# Altium PCB PCB1 - 修改mos管.PcbDoc
Units mil, origin at the board's own origin, x right, y up, seen from the top; angles counter-clockwise.
Board outline 3942.02 x 3942.03 mil, 2 copper layers (Top Layer, Bottom Layer); 55 components, 42 nets, 188 pads, 32 vias.
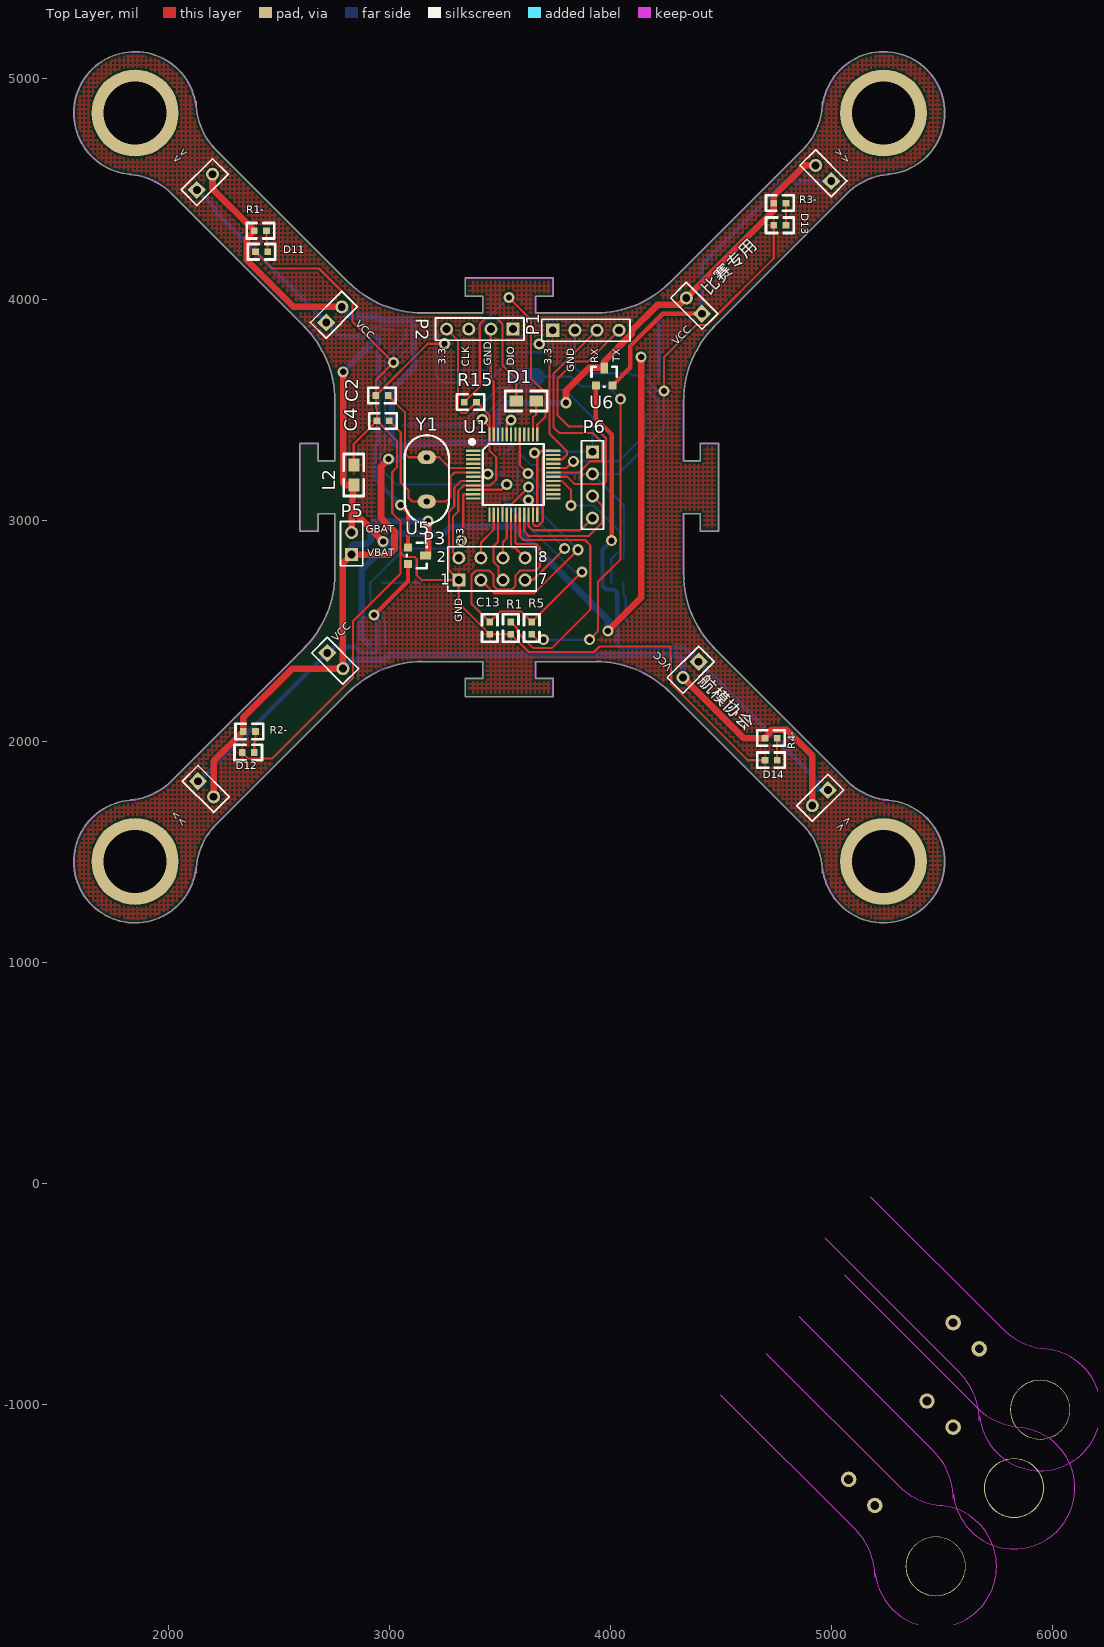
[diagram p0: Top Layer view]
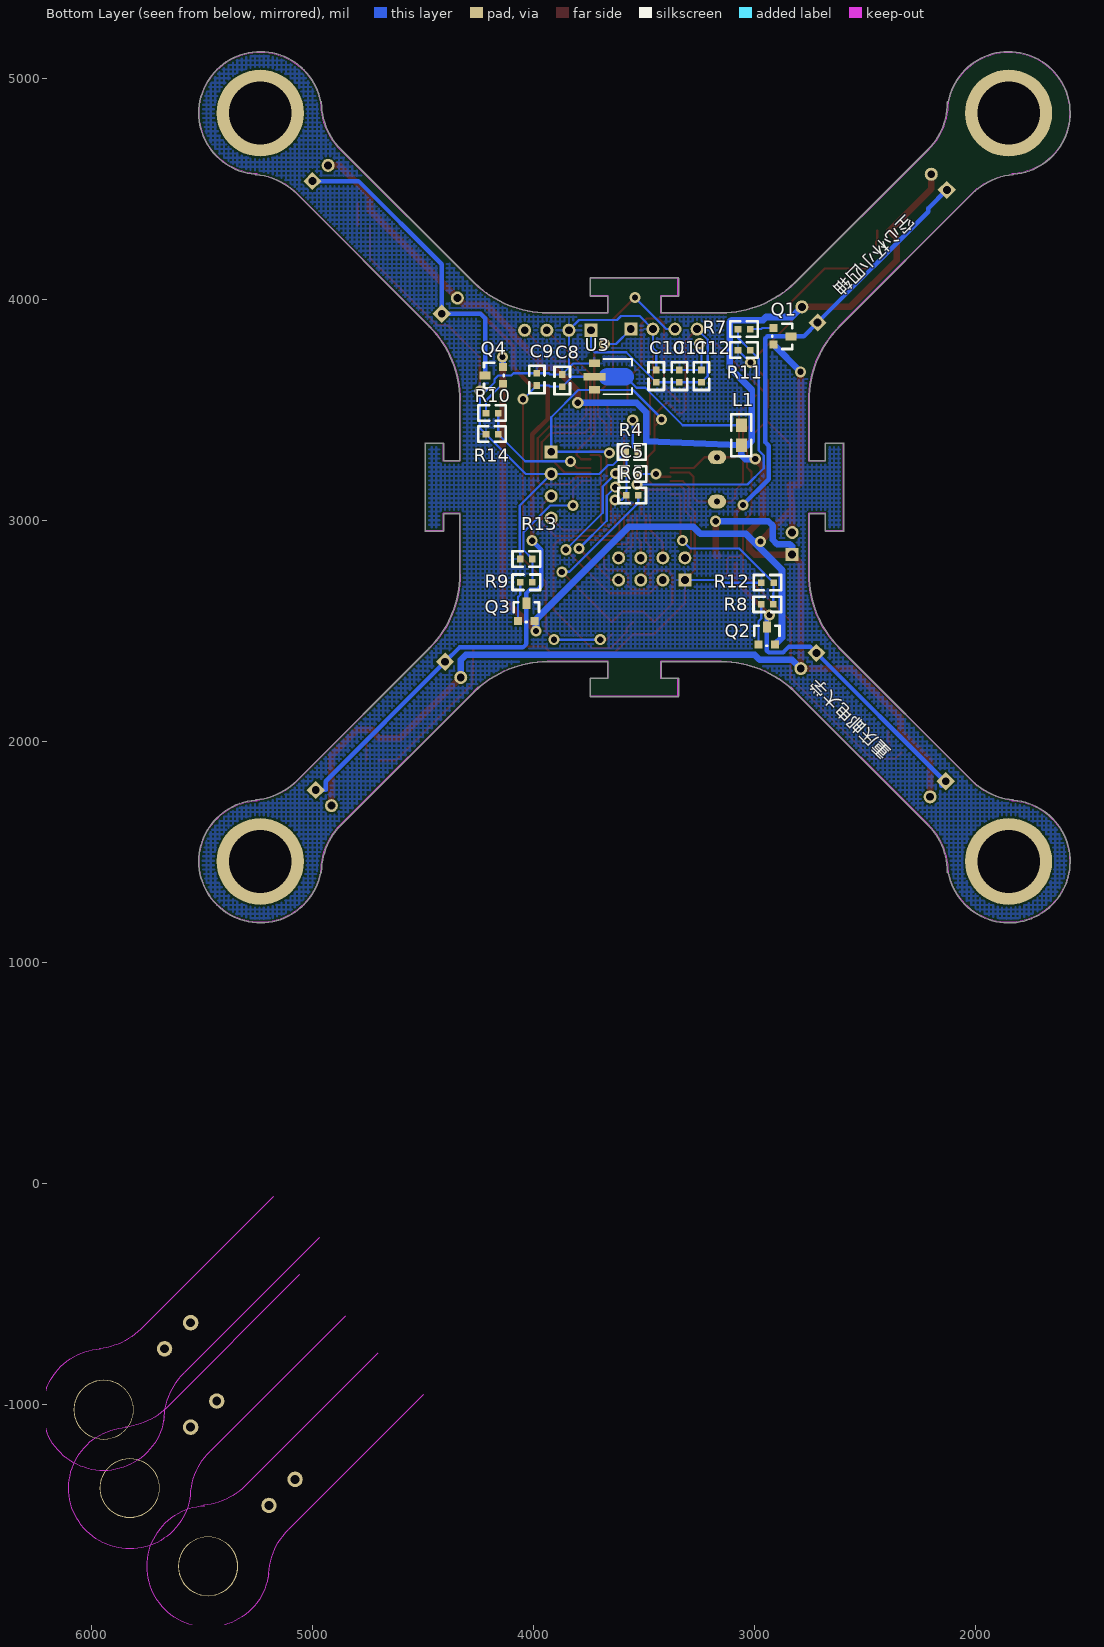
[diagram p1: Bottom Layer view, seen from below]

## Layer stack, top to bottom
Top Solder: solder mask 0.4, Solder Resist, Dk 3.5
Top Layer: signal copper 1.4
Dielectric 1: dielectric 12.6, FR-4, Dk 4.8
Bottom Layer: signal copper 1.4
Bottom Solder: solder mask 0.4, Solder Resist, Dk 3.5

## Board outline
1828.55,1733.94 ccw(c1850.39,1456.69) 2123.7,1405.26 ccw(c2124.88,1407.48) 2127.39,1407.48 cw(c2431.1,1407.48) 2216.33,1622.22 cw(c2431.1,1407.48) 2216.35,1622.24 2820.31,2226.2 ccw(c2820.49,2228.71) 2822.24,2226.9 cw(c3149.61,1889.76) 3149.61,2359.69 3422.68,2359.69 3422.68,2285.98 3346.46,2285.98 ccw(c3346.46,2283.46) 3343.94,2283.46 3343.94,2204.72 ccw(c3346.46,2204.72) 3346.46,2202.21 3740.16,2202.21 ccw(c3740.16,2204.72) 3742.67,2204.72 3742.67,2283.46 ccw(c3740.16,2283.46) 3740.16,2285.98 3663.93,2285.98 3663.93,2359.69 3937.01,2359.69 cw(c3937.01,1889.76) 4264.37,2226.9 ccw(c4266.12,2228.71) 4266.31,2226.2 4870.27,1622.24 ccw(c4872.05,1624.02) 4870.28,1622.22 ccw(c4655.51,1407.48) 4870.27,1622.24 4870.28,1622.22 cw(c4655.51,1407.48) 4959.22,1407.48 ccw(c4961.74,1407.48) 4962.91,1405.26 ccw(c5236.22,1456.69) 5514.33,1456.69 ccw(c5236.22,1456.69) 5258.06,1733.94 ccw(c5255.94,1732.6) 5256.18,1735.1 cw(c5285.43,2037.4) 5070.68,1822.64 4471.67,2421.65 ccw(c4469.16,2421.76) 4471.68,2421.76 ccw(c4469.16,2421.76) 4470.94,2423.54 cw(c4803.15,2755.91) 4333.22,2755.91 4333.22,3028.98 4406.93,3028.98 4406.93,2952.76 ccw(c4409.45,2952.76) 4409.45,2950.24 4488.19,2950.24 ccw(c4488.19,2952.76) 4490.7,2952.76 4490.7,3346.46 ccw(c4488.19,3346.46) 4488.19,3348.97 4409.45,3348.97 ccw(c4409.45,3346.46) 4406.93,3346.46 4406.93,3270.23 4333.22,3270.23 4333.22,3543.31 cw(c4803.15,3543.31) 4470.94,3875.67 ccw(c4469.16,3877.45) 4471.68,3877.45 ccw(c4469.16,3877.45) 4471.67,3877.57 5070.68,4476.57 cw(c5285.43,4261.81) 5256.18,4564.11 ccw(c5255.94,4566.61) 5258.06,4565.27 ccw(c5236.22,4842.52) 5514.33,4842.52 ccw(c5236.22,4842.52) 4962.91,4893.96 ccw(c4961.74,4891.73) 4959.22,4891.73 cw(c4655.51,4891.73) 4870.28,4676.99 cw(c4655.51,4891.73) 4870.27,4676.98 cw(c4872.05,4675.2) 4870.28,4676.99 4870.27,4676.98 4266.31,4073.01 ccw(c4266.12,4070.5) 4264.37,4072.31 cw(c3937.01,4409.45) 3937.01,3939.52 3663.93,3939.52 3663.93,4013.23 3740.16,4013.23 ccw(c3740.16,4015.75) 3742.67,4015.75 3742.67,4094.49 ccw(c3740.16,4094.49) 3740.16,4097 3346.46,4097 ccw(c3346.46,4094.49) 3343.94,4094.49 3343.94,4015.75 ccw(c3346.46,4015.75) 3346.46,4013.23 3422.68,4013.23 3422.68,3939.52 3149.61,3939.52 cw(c3149.61,4409.45) 2822.24,4072.31 ccw(c2820.49,4070.5) 2820.31,4073.01 2216.35,4676.98 cw(c2431.1,4891.73) 2216.33,4676.99 cw(c2431.1,4891.73) 2127.39,4891.73 ccw(c2124.88,4891.73) 2123.7,4893.96 ccw(c1850.39,4842.52) 1828.55,4565.27 ccw(c1830.68,4566.61) 1830.44,4564.11 cw(c1801.18,4261.81) 2015.94,4476.57 2614.94,3877.57 ccw(c2617.45,3877.45) 2615.67,3875.67 cw(c2283.46,3543.31) 2753.39,3543.31 2753.39,3270.23 2679.68,3270.23 2679.68,3346.46 ccw(c2677.17,3346.46) 2677.17,3348.97 2598.43,3348.97 ccw(c2598.43,3346.46) 2595.91,3346.46 2595.91,2952.76 ccw(c2598.43,2952.76) 2598.43,2950.24 2677.17,2950.24 ccw(c2677.17,2952.76) 2679.68,2952.76 2679.68,3028.98 2753.39,3028.98 2753.39,2755.91 cw(c2283.46,2755.91) 2615.67,2423.54 ccw(c2617.45,2421.76) 2614.94,2421.65 2015.94,1822.64 cw(c1801.18,2037.4) 1830.44,1735.1 ccw(c1830.68,1732.6)

## Design rules (kind name [scope] priority, off if disabled: settings)
Clearance [All] p1: gap=7.8
PolygonConnect [All] p1: connectstyle=Relief reliefconductorwidth=10 reliefentries=4 polygonreliefangle="90 Angle" airgapwidth=10
RoutingVias [All] p1: holewidth=28 width=50 viastyle="Through Hole" minholewidth=28 minwidth=50 maxholewidth=28 maxwidth=50
SolderMaskExpansion [All] p1: expansion=4
UnpouredPolygon [All] p1: allowunpoured=FALSE
Width Width_5 [InNet('MOTO4')] p1: maxlimit=20 minlimit=20 preferedwidth=20
Width Width_4 [InNet('MOTO3')] p2: maxlimit=20 minlimit=20 preferedwidth=20
Width Width_3 [InNet('MOTO2')] p3: maxlimit=20 minlimit=20 preferedwidth=20
Width Width_2 [InNet('MOTO1')] p4: maxlimit=20 minlimit=20 preferedwidth=20
Width Width_1 [InNet('VCC_BAT')] p5: maxlimit=30 minlimit=30 preferedwidth=30
Width [InNet('GND_BAT')] p6: maxlimit=30 minlimit=30 preferedwidth=30
29 further rules are at their usual default settings.

## Classes and differential pairs
component class "Sheet1 - 修改mos管": C2 C4 C5 C8 C9 C10 C11 C12 C13 D1 D11 D12 D13 D14 L1 L2 P1 P2 P3 P5 P6 Q1 Q2 Q3 Q4 R1 R1- R2- R3- R4 R4- R5 R6 R7 R8 R9 R10 R11 R12 R13 R14 R15 U1 U3 U5 U6 Y1

## Components (designator, comment, footprint, x,y, rotation, side; value= is the part's Value field where it differs from the comment)
C2 "cap" 0603 2940,3565 r0 top
C4 "cap" 0603 2945,3450 r0 top
C5 "cap" 0603 3580,3210 r180 bottom
C8 "cap" 0603 3870,3660 r270 bottom
C9 "cap" 0603 3985,3665 r270 bottom
C10 "cap" 0603 3445,3680 r270 bottom
C11 "cap" 0603 3340,3680 r270 bottom
C12 "cap" 0603 3240,3680 r270 bottom
C13 "cap" 0603 3455,2485 r90 top
D1 "LED0" 0805 3575,3540 r0 top
D11 "LED0" 0603c 2450,4215 r180 top
D12 "LED0" 0603c 2390,1950 r180 top
D13 "LED0" 0603c 4795,4335 r180 top
D14 "LED0" 0603c 4755,1915 r180 top
L1 "Inductor" 0805 3060,3340 r90 bottom
L2 "Inductor10mH" 0805 2840,3250 r270 top
P1 "Header 4" HDR1X4 3740,3860 r0 top
P2 "Header 4" HDR1X4 3560,3865 r180 top
P3 "Header 4X2" HDR2X4 3315,2730 r0 top
P5 "Header 2" HDR1X2 2830,2845 r90 top
P6 "Header 4" HDR1X4 3920,3310 r270 top
Q1 "SI2302" SOT-23 2915,3870 r270 bottom
Q2 "SI2302" SOT-23 2982,2438 r180 bottom
Q3 "SI2302" SOT-23 4070,2545 r180 bottom
Q4 "SI2302" SOT-23 4139,3618 r90 bottom
R1 "res" 0603 3550,2540 r270 top
R1- "res" 0603c 2390,4310 r0 top
R2- "res" 0603c 2340,2045 r0 top
R3- "res" 0603c 4740,4435 r0 top
R4 "res" 0603 3583,3309 r180 bottom
R4- "res" 0603c 4700,2015 r0 top
R5 "res" 0603 3645,2485 r90 top
R6 "res" 0603 3526,3113 r0 bottom
R7 "res" 0603 3075,3865 r180 bottom
R8 "res" 0603 2915,2620 r0 bottom
R9 "res" 0603 4005,2720 r0 bottom
R10 "res" 0603 4160,3485 r0 bottom
R11 "res" 0603 3075,3770 r180 bottom
R12 "res" 0603 2969,2718 r180 bottom
R13 "res" 0603 4060,2825 r180 bottom
R14 "res" 0603 4215,3390 r180 bottom
R15 "res" 0603 3395,3535 r180 top
U1 "STM32F103C8T6" LQFP48S 3380,3315 r0 top
U3 "XC6203E" SOT-89 3725,3710 r270 bottom
U5 "BAT54C" SOT-23 3085,2878 r270 top
U6 "BAT54C" SOT-23 3935,3610 r0 top
Y1 "5032xtal" XTAL 3170,3185 r90 top
? "Comment" HDR1X2 4400,2360 r225 top
? "Comment" HDR1X2 4415,3935 r135 top
? "Comment" HDR1X2 2715,3895 r45 top
? "Comment" HDR1X2 2720,2400 r315 top
? "Comment" HDR1X2 2135,1820 r315 top
? "Comment" HDR1X2 2130,4495 r45 top
? "Comment" HDR1X2 5000,4535 r135 top
? "Comment" HDR1X2 4985,1780 r225 top

## Footprints (in the part's own frame and the unit in brackets; to place one, negate y for a bottom-side part, rotate by r counter-clockwise, add the part's x,y. Pads: shape width x height; smd on the part's side, far side on the other; paste and mask are expansions set on the pad)
0603 [mil]
  rect 30x30 smd: 1(0,0) 2(55,0)
  silkscreen extent -35,-35 90,35
0603c [mil]
  rect 30x30 smd: 1(0,0) 2(55,0)
  silkscreen extent -35,-35 90,35
0805 [mil]
  rect 60x50 smd: 1(0,0) 2(90,0)
  silkscreen extent -50,-45 140,45
HDR1X2 [mm] "Connector; Header; 2 Position"
  rect 1.5x1.5 hole 0.9: 1(0,0)
  round 1.5 hole 0.9: 2(2.54,0)
  silkscreen extent -1.27,-1.27 3.81,1.27
HDR1X4 [mm] "Connector; Header; 4 Position"
  rect 1.5x1.5 hole 0.9: 1(0,0)
  round 1.5 hole 0.9: 2(2.54,0) 3(5.08,0) 4(7.62,0)
  silkscreen extent -1.27,-1.27 8.89,1.27
HDR2X4 [mm] "Connector; Header; 4x2 Position"
  rect 1.5x1.5 hole 0.9: 1(0,0)
  round 1.5 hole 0.9: 2(0,2.54) 3(2.54,0) 4(2.54,2.54) 5(5.08,0) 6(5.08,2.54) 7(7.62,0) 8(7.62,2.54)
  silkscreen extent -1.27,-1.27 8.89,3.81
LQFP48S [mil] "DPIN-0.5"
  rect 65x10 smd: 1(0.42,0.29) 2(0.42,-19.39) 3(0.42,-39.08) 4(0.42,-58.76) 5(0.42,-78.45) 6(0.42,-98.13) 7(0.42,-117.82) 8(0.42,-137.5) 9(0.42,-157.19) 10(0.42,-176.87) 11(0.42,-196.56) 12(0.42,-216.24) 25(362.63,-216.24) 26(362.63,-196.56) 27(362.63,-176.87) 28(362.63,-157.19) 29(362.63,-137.5) 30(362.63,-117.82) 31(362.63,-98.13) 32(362.63,-78.45) 33(362.63,-58.76) 34(362.63,-39.08) 35(362.63,-19.39) 36(362.63,0.29)
  rect 10x65 smd: 13(73.26,-289.08) 14(92.94,-289.08) 15(112.63,-289.08) 16(132.31,-289.08) 17(152,-289.08) 18(171.68,-289.08) 19(191.37,-289.08) 20(211.05,-289.08) 21(230.74,-289.08) 22(250.42,-289.08) 23(270.11,-289.08) 24(289.79,-289.08) 37(289.79,73.13) 38(270.11,73.13) 39(250.42,73.13) 40(230.74,73.13) 41(211.05,73.13) 42(191.37,73.13) 43(171.68,73.13) 44(152,73.13) 45(132.31,73.13) 46(112.63,73.13) 47(92.94,73.13) 48(73.26,73.13)
  silkscreen extent -10,-246 319,46
SOT-23 [mil]
  rect 36x36 smd: 1(0,0) 2(75,0)
  rect 36x50 smd: 3(38,80)
  silkscreen extent -20,-5 95,85
SOT-89 [mil]
  rect 34x50 smd: 1(0,0) 3(120,0)
  rect 34x100 smd: 2(60,0)
  Top Layer lines w80: 60,140 60,93 60,62 60,60
  silkscreen extent -20,40 140,170
XTAL [mil]
  oval 62x82 hole 28: 1(-100,0) 2(100,0)
  silkscreen extent -200,-100 200,100

## Part data
D1 D11 D12 D13 D14: "Typical INFRARED GaAs LED"
L2: library part Inductor
P1 P2 P6: "Header, 4-Pin"
P3: "Header, 4-Pin, Dual row"
P5: "Header, 2-Pin"
U3: library part XC6203

## Free pads (board coordinates)
  round 70 hole 40: 0(5196.85,-1456.69) 0(5551.18,-1102.36) 0(5669.29,-748.03) 1(5078.74,-1338.58) 1(5433.07,-984.25) 1(5551.18,-629.92)
  round 393.7 hole 283.46: 3(1850.39,1456.69) 3(1850.39,4842.52) 3(5236.22,1456.69) 3(5236.22,4842.52)
  round 271.65 hole 263.78: 3(5472.44,-1732.28) 3(5826.77,-1377.95) 3(5944.88,-1023.62)

## Via types
v1: diameter 50, hole 28, Top Layer to Bottom Layer, 32 vias

## Nets (pads, with @x,y where several pads share a name; then routed paths per layer and width w, separated by ;. In a path a pad name is that pad's centre, name@x,y a point inside that pad or via, vN(x,y) a via of type N, cw(c..) or ccw(c..) an arc to the next point about the centre after c; other vN are vias at no path point)
3.3V: C10.2 C11.2 C12.2 P1.1 P2.4 P3.2 P6.1 R15.1 U1.9 U1.24 U1.36 U1.48 U3.3 | length 3763.9
  Top Layer w10: P2.4 3312,3813 3312,3501 3328,3485 3345,3485 R15.1 3453.26,3476.74 3453.26,3424 ; P3.2 3288.2,2856.8 3288.2,3016.6 3312.32,3040.72 3312.32,3133.32 3336.81,3157.81 U1.9 3457.81,3157.81 3484,3184 3484,3285.69 3453.26,3316.43 U1.48 3453.26,3424 ; v1(3421,3456.26) 3453.26,3424 ; v1(3657,3304) v1@3669.79,3291.21 ; U1.24 v1@3669.79,3291.21 ; U1.36 3689.09,3315.29 3669.79,3296 v1@3669.79,3291.21
  Bottom Layer w10: P2.4 3212,3817 3212,3653 C12.2 C11.2 C10.2 3580,3760 3724,3760 3740,3776 P1.1 ; v1(3421,3456.26) 3421,3460.65 3550.35,3590 U3.3 3797,3590 3920,3467 P6.1 3663,3310 v1(3657,3304)
AD: C13.2 R5.2 R6.1 U1.19 | length 2091.7
  Top Layer w10: U1.19 3571.37,2898.63 3577,2893 3664,2893 3681,2876 3681,2790 3664,2773 3593,2773 3572,2752 3572,2704 3555.67,2687.67 3488,2687.67 3472,2703.67 3472,2754 3453,2773 3392,2773 3372,2753 3372,2623 C13.2 3502,2587 3598,2587 R5.2 v1(3872,2767)
  Bottom Layer w10: R6.1 3526,3078.61 3837.61,2767 v1(3872,2767)
GND: C2.1 C4.1 C5.1 C8.1 C9.1 C10.1 C11.1 C12.1 C13.1 D11.2 D12.2 D13.2 D14.2 L2.1 P1.2 P2.2 P3.1 P6.2 R1.2 R4.1 R6.2 R11.1 R12.1 R13.1 R14.1 U1.8 U1.23 U1.35 U1.47 U3.1 | length 12395.8
  Top Layer w10: D12.2 2363,1922 2470,1922 2836,2288 2836,2544 3051.8,2759.8 3051.8,2854.2 ; D11.2 2471,4139 2683,4139 2834,3988 2834,3899 v1(3019,3714) 2940,3635 C2.1 ; L2.1 2840,3345 C4.1 ; v1(3250,3799) 3174,3799 C2.1 ; U1.8 3324.3,3177.5 3294.52,3147.72 3294.52,3063.52 3270.4,3039.4 3270.4,2774.6 P3.1 ; P2.2 3460,3639.94 3472.94,3627 U1.47 ; v1(3631,3092) 3650.11,3072.89 U1.23 3650.11,2984 3660.11,2974 3674,2974 3694.66,2994.66 3694.66,3286.26 3704,3295.61 U1.35 ; v1(4243,3585) 4243,3738 4389,3884 4438,3884 4740,4186 D13.2 ; D14.2 4622,1915 4276,2261 4273,2429 3951.71,2429 3926.89,2404.18 3630.82,2404.18 R1.2 C13.1 3315,2625 P3.1 ; C2.1 2940,3510 2945,3505 C4.1 ; C4.1 3034.8,3360.2 3034.8,3239.56 3014.11,3218.87 3014.11,3032.2 3051.8,2994.51 3051.8,2854.2 ; 3051.8,2854.2 3072,2834 3115,2834 3125,2824 3125,2752 3147,2730 P3.1
  Bottom Layer w10: R12.1 3142,2718 3154,2730 P3.1 ; v1(3019,3714) R11.1 ; v1(3250,3799) 3240,3789 C12.1 C11.1 C10.1 3445,3765 3460,3780 P2.2 3519,3924 3604,3924 3622,3906 3794,3906 P1.2 3840,3690 ; v1(3631,3092) 3602,3092 R6.2 3581,3127.4 3580,3128.4 C5.1 3580,3294.54 3583,3294.54 R4.1 3642.2,3249.8 3662.77,3249.8 3702.57,3210 P6.2 ; U3.1 3820,3710 3840,3690 ; R13.1 4060,2853.12 4062.6,2855.72 4062.6,3067.4 P6.2 ; v1(4243,3585) 4243,3558 ; 3840,3690 C8.1 3925,3660 3930,3665 C9.1 4091,3665 4101,3655 4160,3655 4176,3639 4176,3625 4243,3558 ; P6.2 4035,3210 R14.1 4243,3418 4243,3558
GND_BAT: L2.2 P5.2 Q1.2 Q2.2 Q3.2 Q4.2 | length 4307.8
  Top Layer w30: v1(2792,3672) 2792,3168 2800,3160 L2.2 2830,3053 ; P5.2 2830,3053 ; v1(2973,2904) 2830,3053 ; v1(3989,2499) 4140,2650 v1(4140,3739)
  Bottom Layer w30: v1(2792,3672) Q1.2 ; Q2.2 2876,2469 2876,2775.2 3004.8,2904 ; v1(2973,2904) 3004.8,2904 ; v1(3989,2499) 3989,2539 Q3.2 3568.2,2971.8 3278.2,2971.8 3246.53,2940.13 3040.93,2940.13 3004.8,2904 ; Q4.2 4139,3738 v1(4140,3739)
INC: U1.25
LED1: D1.2 U1.38 | length 158
  Top Layer w10: U1.38 3650.11,3465 3665,3479.89 D1.2
MISO: P3.7 U1.16 | length 774.5
  Top Layer w10: U1.16 3512.31,3064 3521.31,3073 3553,3073 v1(3630,3150) ; P3.7 3651,2730 v1(3794,2873)
  Bottom Layer w10: v1(3630,3150) 3668.8,3111.2 3668.8,2998.2 v1(3794,2873)
MOSI: P3.6 U1.17 | length 203
  Top Layer w10: P3.6 3515,2902.07 3532,2919.07 U1.17
MOTO1: ?.1@2130,4495 ?.1@2715,3895 Q1.3 U5.1 | length 2121.7
  Top Layer w20: v1(3052,3070) 3085,3037 U5.1
  Bottom Layer w20: ?.1@2130,4495 2214,4411 2214,4396 2715,3895 2778,3832 Q1.3 2943,3832 2951,3824 2951,3352.99 2935.97,3337.96 2935.97,3186.03 v1(3052,3070)
MOTO2: ?.1@2135,1820 ?.1@2720,2400 Q2.3 U5.2 | length 1575.9
  Top Layer w20: v1(2932,2572) 3085,2725 U5.2
  Bottom Layer w20: ?.1@2135,1820 2156,1799 2156,1836 2720,2400 2749,2429 2844.2,2429 2871,2402.2 2936,2402.2 2944,2410.2 Q2.3 2944,2560 v1(2932,2572)
MOTO3: ?.1@4400,2360 ?.1@4985,1780 Q3.3 U6.1 | length 2513.2
  Top Layer w20: U6.1 3935,3460 4006,3389 v1(4006,2908)
  Bottom Layer w20: v1(4006,2908) 3965.13,2867.13 3965.13,2703.87 3982,2687 4016,2687 4032,2671 Q3.3 4032,2441 4048,2425 4335,2425 4400,2360 4940,1820 4940,1780 ?.1@4985,1780
MOTO4: ?.1@4415,3935 ?.1@5000,4535 Q4.3 U6.2 | length 2023.7
  Top Layer w20: U6.2 4091,3691 4091,3788.71 4237.29,3935 ?.1@4415,3935
  Bottom Layer w20: Q4.3 4219,3914 4240,3935 4415,3935 4415,4158 4792,4535 ?.1@5000,4535
NetC2_2: C2.2 U1.5 Y1.2 | length 631
  Top Layer w10: C2.2 3071,3489 3071,3302 3088,3285 Y1.2 3226.55,3285 3275,3236.55 U1.5
NetC4_2: C4.2 U1.6 Y1.1 | length 793.9
  Top Layer w10: C4.2 3052.6,3397.4 3052.6,3170.8 3087,3136.4 3087,3102 3104,3085 Y1.1 3257.72,3085 3276.72,3104 3276.72,3197.59 3296,3216.87 U1.6
NetD1_1: D1.1 R15.2 | length 879.4
  Top Layer w10: R15.2 3410,3605 3410,3888 3435,3913 3488,3913 3513,3888 3513,3702 3575,3640 D1.1
NetD11_1: D11.1 R1-.2 | length 97.1
  Top Layer w10: R1-.2 2445,4265 2450,4260 D11.1
NetD12_1: D12.1 R2-.2 | length 97.1
  Top Layer w10: D12.1 2390,1995 2395,2000 R2-.2
NetD13_1: D13.1 R3-.2 | length 100
  Top Layer w10: D13.1 R3-.2
NetD14_1: D14.1 R4-.2 | length 100
  Top Layer w10: D14.1 R4-.2
NetQ1_G: Q1.1 R7.2 | length 107.1
  Bottom Layer w10: Q1.1 2965,3870 2970,3865 R7.2
NetQ2_G: Q2.1 R8.2 | length 187
  Bottom Layer w10: R8.2 2970,2556 2982,2544 Q2.1
NetQ3_G: Q3.1 R9.2 | length 179.1
  Bottom Layer w10: R9.2 4060,2663 4070,2653 Q3.1
NetQ4_G: Q4.1 R10.2 | length 164.5
  Bottom Layer w10: Q4.1 4215,3542 R10.2
NetR1_1: R1.1 U1.20 | length 1215.1
  Top Layer w10: R1.1 3578,2512 3578,2496 3652.02,2421.98 3735.94,2421.98 3910,2596.03 3910,2886.8 3885.63,2911.17 3607.88,2911.17 3591.05,2928 U1.20
NetR4_2: R4.2 U1.44 | length 228.3
  Top Layer w10: U1.44 3532,3435 v1(3551,3454)
  Bottom Layer w10: R4.2 3551,3332 v1(3551,3454)
NRST: C5.2 U1.7 | length 149.9
  Top Layer w10: U1.7 3433.18,3197.18 v1(3446,3210)
  Bottom Layer w10: v1(3446,3210) C5.2
PWM1: R7.1 R11.2 U1.10 | length 1442.9
  Top Layer w10: U1.10 3508.13,3138.13 v1(3532,3162)
  Bottom Layer w10: R7.1 3075,3825 R11.2 2981,3731 2981,3315.96 2958.77,3293.73 2958.77,3235.23 3032,3162 v1(3532,3162)
PWM2: R8.1 R12.2 U1.11 | length 847.8
  Top Layer w10: v1(3326,2908) 3335.12,2917.12 3335.12,3117 3336.56,3118.44 U1.11
  Bottom Layer w10: R8.1 2915,2668 2914,2669 R12.2 3069,2873 3291,2873 v1(3326,2908)
PWM3: R9.1 R13.2 U1.29 | length 682.7
  Top Layer w10: U1.29 3782.43,3177.5 3822,3137.93 v1(3822,3067)
  Bottom Layer w10: v1(3822,3067) 3924.8,3067 4044.8,2947 4044.8,2864.8 R13.2 R9.1
PWM4: R10.1 R14.2 U1.32 | length 575.9
  Top Layer w10: U1.32 3802.55,3236.55 v1(3833,3267)
  Bottom Layer w10: v1(3833,3267) 4037,3267 R14.2 R10.1
RX1: P1.3 U1.31 | length 1093.1
  Top Layer w10: U1.31 3859.52,3216.87 3909.66,3267 3958,3267 3963,3272 3963,3353.71 3921.51,3395.2 3768.8,3395.2 3743.4,3420.6 3743.4,3663.4 P1.3
SCL: P6.3 U1.21 | length 599.9
  Top Layer w10: U1.21 3610.74,2950.23 3632,2928.97 3902.97,2928.97 3962.33,2988.33 3962.33,3067.67 P6.3
SDA: P6.4 U1.22 | length 372.6
  Top Layer w10: U1.22 3630.42,2972.88 3648,2955.3 3865.3,2955.3 P6.4
SWCLK: P2.3 U1.37 | length 945.9
  Top Layer w10: v1(3541.5,4008.5) 3641,3909 3641,3642.8 3707.8,3576 3707.8,3470.01 3669.79,3432 U1.37
  Bottom Layer w10: P2.3 3398,3865 v1(3541.5,4008.5)
SWDIO: P2.1 U1.34 | length 770.2
  Top Layer w10: v1(3679,3798) 3725.6,3751.4 3725.6,3392.4 3804,3314 3804,3296 3783.92,3275.92 U1.34
  Bottom Layer w10: P2.1 3627,3798 v1(3679,3798)
TX1: P1.4 U1.30 | length 1250.4
  Top Layer w10: U1.30 3805.73,3197.18 3837.91,3165 3972,3165 3981,3174 3981,3372 3929,3424 3813.2,3424 3761.2,3476 3761.2,3640.2 3839,3718 3898,3718 P1.4
VCC: C8.2 C9.2 L1.2 R5.1 U3.2 | length 2462.9
  Top Layer w10: R5.1 3670,2460 v1(3698,2460) ; v1(3907,2460) 3945,2498 3945,2722 4047,2824 v1(4047,3548)
  Bottom Layer w10: L1.2 3325.11,3430 3494.55,3599.44 3534.44,3599.44 3585,3650 ; 3665,3650 U3.2 3825,3650 C8.2 3925,3605 3930,3610 C9.2 v1(4047,3548) ; v1(3698,2460) v1(3907,2460)
VCC_BAT: ?.2 L1.1 P5.1 R1-.1 R2-.1 R3-.1 R4-.1 U5.3 U6.3 | length 10084
  Top Layer w30: ?.2@2200.71,4565.71 2200.71,4499.29 R1-.1 2357,4277 2357,4177 2568.29,3965.71 ?.2@2785.71,3965.71 ; ?.2@2205.71,1749.29 2205.71,1910.71 R2-.1 2340,2107.37 2561.92,2329.29 2790.71,2329.29 2790.71,2805.71 P5.1 2999,2845 3024,2870 3024,2950 2963,3011 2963,3243 v1(2997,3277) ; U5.3 3176,2840 v1(3176,2996) ; v1(3800,3532) 3800,3586 3904,3690 U6.3 3973,3719 4097,3843 4097,3858 4202,3963 4203,3963 4216,3976 4314.58,3976 4344.29,4005.71 4740,4401.42 R3-.1 4740,4467 4878.71,4605.71 ?.2@4929.29,4605.71 ; ?.2@4329.29,2289.29 4603.58,2015 R4-.1 4717,2032 4717,2042 4728,2053 4798,2053 4914.29,1936.71 ?.2@4914.29,1709.29
  Bottom Layer w30: ?.2@2785.71,3965.71 2831.42,3920 2948,3920 2962,3906 3104,3906 3113,3897 3113,3691 3012,3590 3012,3360 3032,3340 L1.1 ; ?.2@2790.71,2329.29 2830.82,2369.4 2977.3,2369.4 2999.9,2392 4305.29,2392 4329.29,2368 ?.2@4329.29,2289.29 ; P5.1 2830,2882 2840,2892 2898,2892 2918,2912 2918,2976 2938,2996 v1(3176,2996) ; v1(2997,3277) 3041,3277 3060,3296 L1.1 ; v1(3800,3532) 3534,3532 3490,3488 3490,3358 L1.1
W_CE: P3.3 U1.41 | length 1175.6
  Top Layer w10: P3.3 3475.13,2669.87 3656.87,2669.87 v1(3854,2867) ; U1.41 3591.05,3248.95 v1(3628,3212)
  Bottom Layer w10: v1(3628,3212) 3686.6,3153.4 3686.6,3034.4 v1(3854,2867)
W_CSN: P3.4 U1.14 | length 219.9
  Top Layer w10: P3.4 3415,2900.06 3472.94,2958 U1.14
W_IRQ: P3.8 U1.18 | length 228
  Top Layer w10: U1.18 3551.68,2883.34 3556.68,2878.35 3566.65,2878.35 P3.8
W_SCK: P3.5 U1.15 | length 322.3
  Top Layer w10: U1.15 3492.63,2902.63 3472,2882 3472,2812.24 3494.11,2790.13 3494.11,2750.89 P3.5
pads on no net: U1.1 U1.2 U1.3 U1.4 U1.12 U1.13 U1.26 U1.27 U1.28 U1.33 U1.39 U1.40 U1.42 U1.43 U1.45 U1.46

## Polygon pours and split planes (outlines as drawn)
GND on Top Layer "Top Layer-No Net" (hatched 90Degree grid 20 track 10, remove dead copper, pour order 3): 1330,5625 1330,930 1050,650 1120,580 6545,580 6545,4460 5565,5440
GND on Bottom Layer "Top Layer-No Net" (hatched 90Degree grid 20 track 10, remove dead copper, pour order 5): 1365,5420 1365,820 5790,820 5905,935 5525,1315 5525,5550

## Keep-outs
Keep-Out Layer:
  lines w5: 1830.68,1732.6 ccw(c1801.18,2037.4) 2017.72,1820.87 2618.11,2421.26 ; 1830.68,4566.61 cw(c1801.18,4261.81) 2017.72,4478.35 2618.11,3877.95 ; 1835.75,1731.89 ccw(c1850.39,1456.69) 2124.04,1424.02 ; 1835.75,4567.32 cw(c1850.39,4842.52) 2124.04,4875.19 ; 2124.88,1407.48 cw(c2431.1,1407.48) 2214.57,1624.02 2824.8,2234.25 ; 2124.88,4891.73 ccw(c2431.1,4891.73) 2214.57,4675.2 2824.8,4064.96 ; 2617.45,2421.76 ccw(c2283.46,2755.91) 2755.91,2755.91 2755.91,3031.5 2677.17,3031.5 2677.17,2952.76 2598.43,2952.76 2598.43,3346.46 2677.17,3346.46 2677.17,3267.72 2755.91,3267.72 2755.91,3543.31 ccw(c2283.46,3543.31) 2617.45,3877.45 ; 2814.96,2224.41 2834.65,2244.09 ; 2820.49,2228.71 cw(c3149.61,1889.76) 3149.61,2362.2 3425.2,2362.2 3425.2,2283.46 3346.46,2283.46 3346.46,2204.72 3740.16,2204.72 3740.16,2283.46 3661.42,2283.46 3661.42,2362.2 3937.01,2362.2 cw(c3937.01,1889.76) 4266.12,2228.71 ; 2820.49,4070.5 ccw(c3149.61,4409.45) 3149.61,3937.01 3425.2,3937.01 3425.2,4015.75 3346.46,4015.75 3346.46,4094.49 3740.16,4094.49 3740.16,4015.75 3661.42,4015.75 3661.42,3937.01 3937.01,3937.01 ccw(c3937.01,4409.45) 4266.12,4070.5 ; 4251.97,2244.09 4271.65,2224.41 ; 4261.81,2234.25 4872.05,1624.02 cw(c4655.51,1407.48) 4961.74,1407.48 ; 4261.81,4064.96 4872.05,4675.2 ccw(c4655.51,4891.73) 4961.74,4891.73 ; 4468.5,2421.26 5068.9,1820.87 ccw(c5285.43,2037.4) 5255.94,1732.6 ; 4468.5,3877.95 5068.9,4478.35 cw(c5285.43,4261.81) 5255.94,4566.61 ; 4469.16,2421.76 cw(c4803.15,2755.91) 4330.71,2755.91 4330.71,3031.5 4409.45,3031.5 4409.45,2952.76 4488.19,2952.76 4488.19,3346.46 4409.45,3346.46 4409.45,3267.72 4330.71,3267.72 4330.71,3543.31 cw(c4803.15,3543.31) 4469.16,3877.45 ; 4498.03,-954.72 5108.27,-1564.96 cw(c4891.73,-1781.5) 5197.96,-1781.5 ; 4704.72,-767.72 5305.12,-1368.11 ccw(c5521.65,-1151.57) 5492.16,-1456.38 ; 4852.36,-600.39 5462.6,-1210.63 cw(c5246.06,-1427.17) 5552.29,-1427.17 ; 4962.57,1424.02 ccw(c5236.22,1456.69) 5250.87,1731.89 ; 4962.57,4875.19 cw(c5236.22,4842.52) 5250.87,4567.32 ; 4970.47,-246.06 5580.71,-856.3 cw(c5364.17,-1072.83) 5670.4,-1072.83 ; 5059.06,-413.39 5659.45,-1013.78 ccw(c5875.98,-797.24) 5846.49,-1102.05 ; 5177.17,-59.06 5777.56,-659.45 ccw(c5994.09,-442.91) 5964.6,-747.72 ; 5198.79,-1764.96 ccw(c5472.44,-1732.28) 5487.09,-1457.08 ; 5553.13,-1410.63 ccw(c5826.77,-1377.95) 5841.42,-1102.75 ; 5671.24,-1056.3 ccw(c5944.88,-1023.62) 5959.53,-748.42 ; 4507.87,-964.57 4507.87,-964.57

## Silkscreen, mask and mechanical layers (free items; w line width, h text height)
Top Overlay:
  text "<<" at 5100,4640 h60 r135
  text "<<" at 2045,4600 h60 r45
  text "比赛专用" at 4460,4000 h100 r45
  text "VCC" at 2835,3875 h60 r315
  text "VCC" at 4310,3780 h60 r45
  text "TX" at 4060,3715 h60 r90
  text "RX" at 3960,3710 h60 r90
  text "3.3" at 3270,3705 h60 r90
  text "3.3" at 3750,3705 h60 r90
  text "GND" at 3475,3700 h60 r90
  text "DIO" at 3580,3700 h60 r90
  text "CLK" at 3375,3695 h60 r90
  text "GND" at 3850,3670 h60 r90
  text "GBAT" at 2895,2930 h60
  text "3.3" at 3350,2890 h60 r90
  text "VBAT" at 2900,2825 h60
  text "GND" at 3345,2540 h60 r90
  text "VCC" at 2770,2440 h60 r45
  text "VCC" at 4295,2350 h60 r135
  text "航模协会" at 4380,2255 h100 r315
  text "<<" at 5065,1675 h60 r225
  text "<<" at 2000,1660 h60 r315
Bottom Overlay:
  text "空心杯小四轴" at 2325,4400 h100 r135
  text "重庆邮电大学" at 2365,1970 h100 r225

## Text inside footprints (layer, text, board x,y; h text height)
P3: Top Overlay "2" at 3215,2810 h50; Top Overlay "1" at 3231,2709 h50; Top Overlay "7" at 3675,2710 h50; Top Overlay "8" at 3675,2810 h50